# EAGLE board pcd_DRAW (EAGLE 9.3.2)
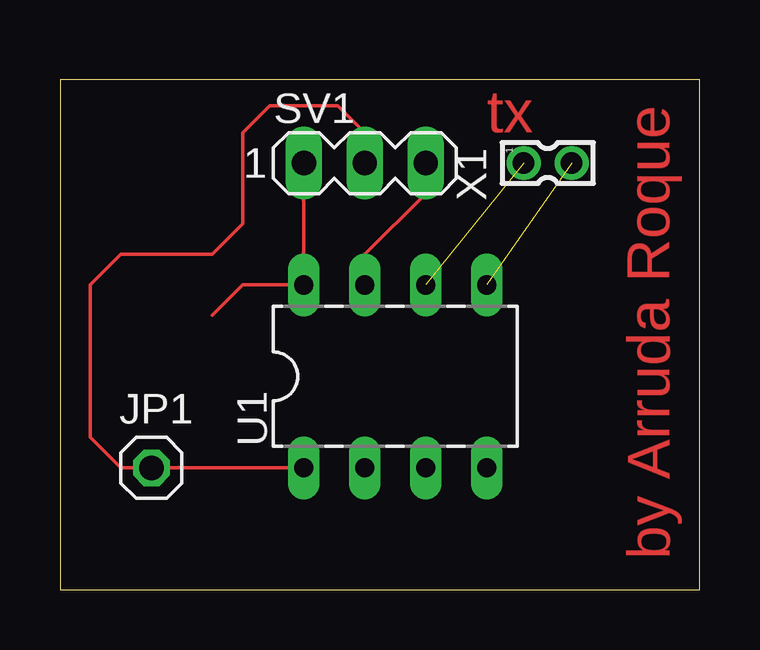
[diagram p0: board, top side]

Size 26.65 x 21.26 mm. Coordinates in mm from the lower left corner, seen from the top.
Outline: 0,0 26.65,0 26.65,21.26 0,21.26 0,0
Copper layers (1*16): Top 0.035mm / dielectric 1.5mm / Bottom 0.035mm
Design rules "default": minimum track width 6mil, minimum drill 0.35mm, track to track 6mil, track to pad 6mil, pad to pad 6mil, via to via 6mil, smd to smd 6mil, copper to edge 40mil, drill to drill 6mil, minimum pad ring 10mil, minimum via ring 8mil, stop-mask expansion 4mil, vias tented up to drill 0mil, thermal gap 10mil

## Footprints (pad centres in the part's own frame; a part is rotated, then mirrored left to right if it is on the bottom)
1X01 = drill 1.016 octagon: 1 0,0
MA03-1 = drill 1.016 long: 1 -2.54,0; 2 0,0; 3 2.54,0
DIL8-P = drill 0.8 pad 1.3 long: 1 -3.81,-3.81; 2 -1.27,-3.81; 3 1.27,-3.81; 4 3.81,-3.81; 5 3.81,3.81; 6 1.27,3.81; 7 -1.27,3.81; 8 -3.81,3.81
87758-0216 = drill 0.9 pad 1.27: 1 0,-1; 2 0,1

## Placement (x,y rotation side)
JP1  [1X01]  3.81,5.08 0 top
SV1  [MA03-1]  12.7,17.78 0 top
U1  PIC12F675/P  [DIL8-P]  13.97,8.89 0 top
X1  87758-0216  [87758-0216]  20.32,17.78 270 top

## Library data of the parts
JP1 = pinhead
SV1 = con-lstb; OC_FARNELL: unknown; OC_NEWARK: unknown
U1 = microchip_pic12f
X1 = con-molex; MF: MOLEX; MPN: 87758-0216; OC_FARNELL: unknown; OC_NEWARK: 94M1513

## Nets
N$1: U1.6 X1.1
N$2: U1.5 X1.2
SINAL: SV1.3 U1.7
VDD: JP1.1 SV1.2 U1.1
VSS: SV1.1 U1.8

## Tracks (layer width: path | path; a pad name or v marks a point on that pad's centre or on a via)
N$1  (1 unrouted)
N$2  (1 unrouted)
SINAL
  Top 0.152: U1.7 12.7,13.97 15.24,16.51 SV1.3
VDD
  Top 0.152: SV1.2 12.7,19.05 11.58,20.17 8.74,20.17 7.62,19.05 7.62,15.24 6.35,13.97 2.54,13.97 1.27,12.7 1.27,6.35 2.54,5.08 JP1.1 U1.1
VSS
  Top 0.152: 6.35,11.43 7.62,12.7 U1.8 SV1.1

## Text on the board
Top: tx | by Arruda Roque